# Altium PCB PCB.PcbDoc (part 3 of 3)
Units mm, origin at the board's own origin, x right, y up, seen from the top; angles counter-clockwise.
Board outline 140.5 x 50 mm, 2 copper layers (Top Layer, Bottom Layer), stack 1.69 mm thick; 217 components, 154 nets, 1179 pads, 592 vias.
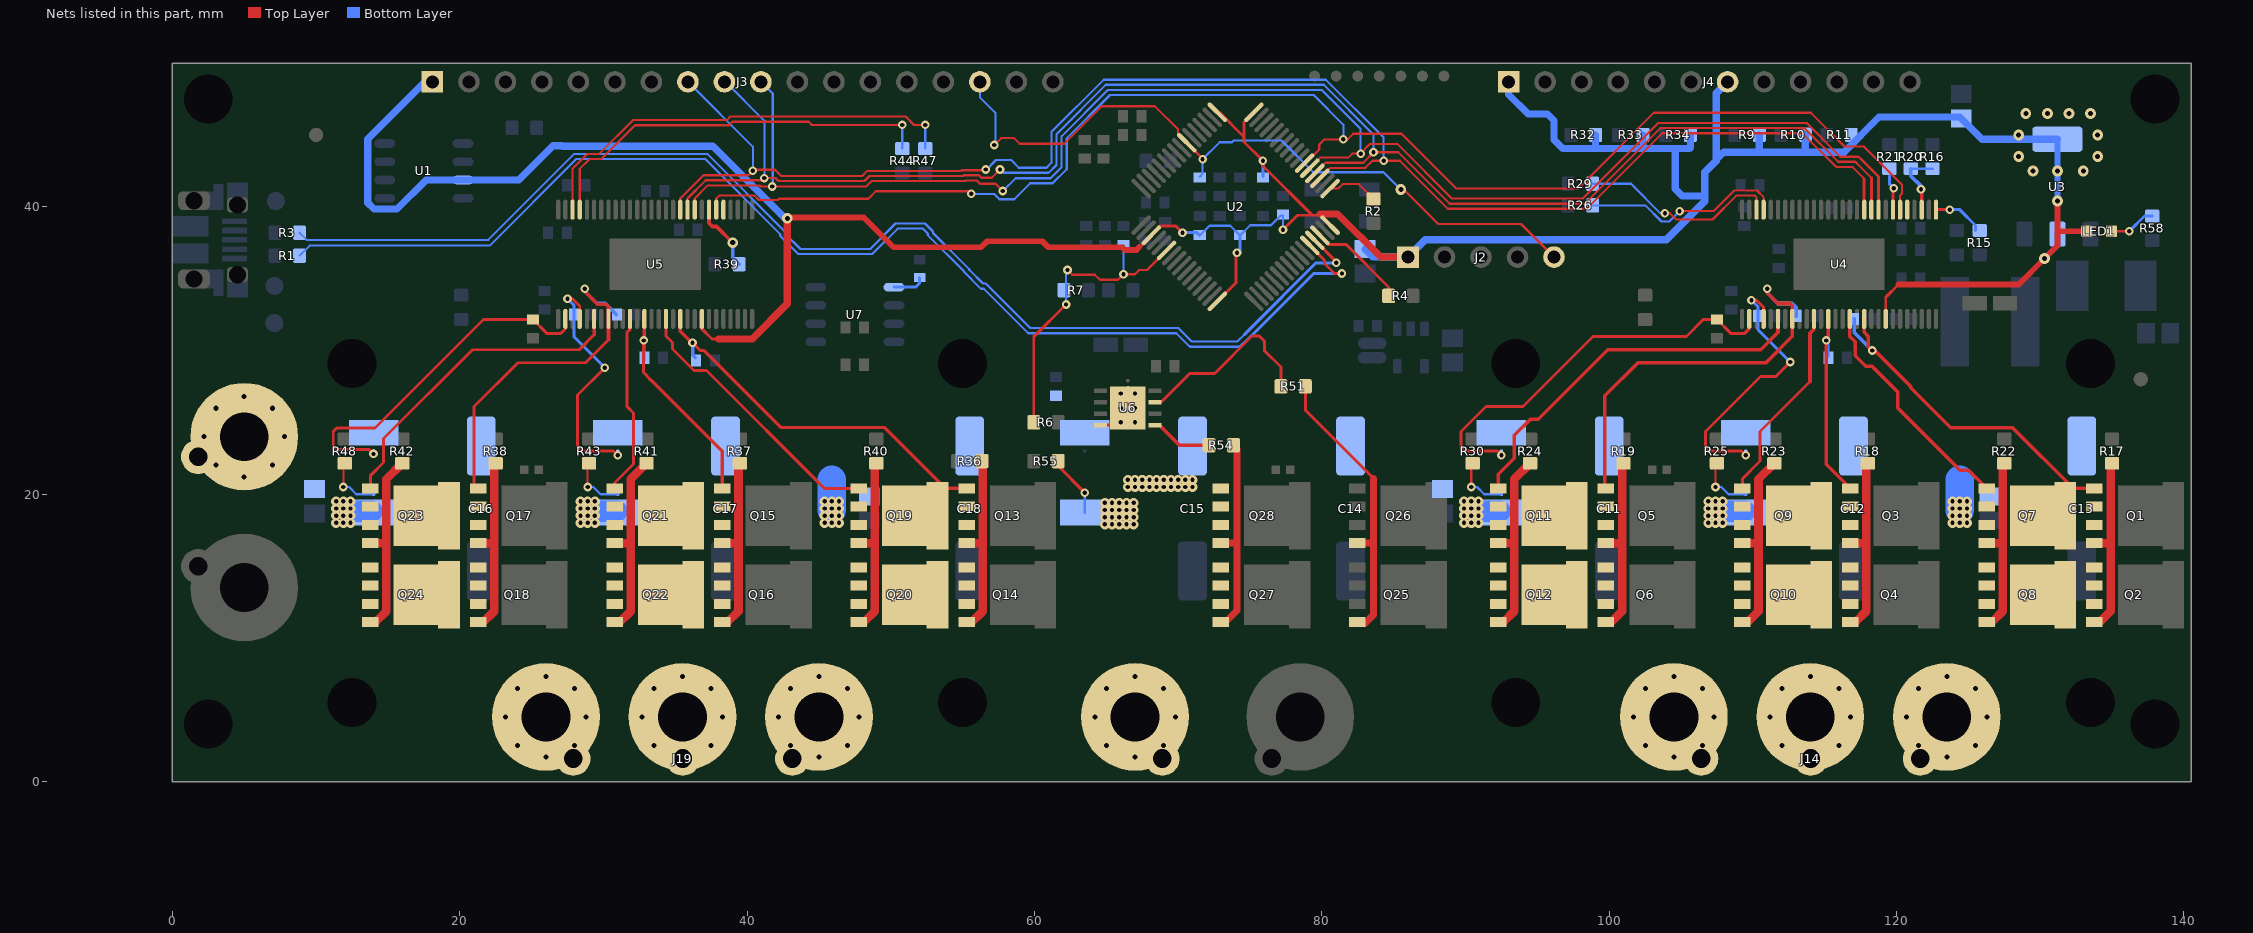
[diagram p3: the nets of this part, all layers, seen from the top]

## Via types
v1: diameter 0.6, hole 0.3, Top Layer to Bottom Layer, tented both sides, 192 vias
v2: diameter 0.7, hole 0.3, Top Layer to Bottom Layer, 154 vias
v3: diameter 0.8, hole 0.3, Top Layer to Bottom Layer, 119 vias
v4: diameter 0.7, hole 0.35, Top Layer to Bottom Layer, 80 vias
v5: diameter 0.75, hole 0.35, Top Layer to Bottom Layer, tented both sides, 37 vias
v6: diameter 0.7, hole 0.3, Top Layer to Bottom Layer, tented both sides, 9 vias
v7: diameter 0.7, hole 0.35, Top Layer to Bottom Layer, tented both sides, 1 vias

## Nets (pads, with @x,y where several pads share a name; then routed paths per layer and width w, separated by ;. In a path a pad name is that pad's centre, name@x,y a point inside that pad or via, vN(x,y) a via of type N, cw(c..) or ccw(c..) an arc to the next point about the centre after c; other vN are vias at no path point) (continued)
NetJ22_1: J22.1 J23.1 R55.2 R56.1 | length 4.5
  Top Layer w0.203: R55.2@61.65,22.3 61.65,21.95 v1(63.5,20.1) ; v2(64.9,19.4) v2@65,19.5
  Bottom Layer w0.203: R56.1@63.5,18.725 v1(63.5,20.1)
  other v2: 64.9,17.9 65.4,17.9 65.9,17.9 66.4,17.9 66.9,17.9 64.9,18.4 65.4,18.4 65.9,18.4 66.4,18.4 66.9,18.4 64.9,18.9 65.4,18.9 65.9,18.9 66.4,18.9 66.9,18.9 65.4,19.4 65.9,19.4 66.4,19.4 66.9,19.4
  other v4: 67,1.7 65.02,2.52 68.98,2.52 64.2,4.5 69.8,4.5 65.02,6.48 68.98,6.48 67,7.3
NetLED1_K: LED1.K R58.1 | length 3.3
  Top Layer w0.203: LED1.K@134.95,38.3 v1(136.2,38.3)
  Bottom Layer w0.203: v1(136.2,38.3) 137.25,39.35 R58.1@137.8,39.35
NetQ1_G: Q1.G Q2.G R17.1 | length 29.6
  Top Layer w0.6: Q2.G@133.775,11.095 134.141,11.095 134.897,11.851 134.897,16.595 ; Q1.G@133.775,16.595 134.897,16.595 ; R17.1@135,22.15 R17.1@134.897,22.15 ; 134.897,16.595 R17.1@134.897,22.15 ; 134.897,16.595 R17.1@134.897,22.15 ; 134.897,16.595 R17.1@134.897,22.15 ; 134.897,16.595 R17.1@134.897,22.15
NetQ3_G: Q3.G Q4.G R18.1 | length 29.6
  Top Layer w0.6: Q4.G@116.775,11.095 117.141,11.095 117.897,11.851 117.897,16.595 ; Q3.G@116.775,16.595 117.897,16.595 ; R18.1@118,22.15 R18.1@117.897,22.15 ; 117.897,16.595 R18.1@117.897,22.15 ; 117.897,16.595 R18.1@117.897,22.15 ; 117.897,16.595 R18.1@117.897,22.15 ; 117.897,16.595 R18.1@117.897,22.15
NetQ5_G: Q5.G Q6.G R19.1 | length 29.6
  Top Layer w0.6: Q6.G@99.775,11.095 100.141,11.095 100.897,11.851 100.897,16.595 ; Q5.G@99.775,16.595 100.897,16.595 ; R19.1@101,22.15 R19.1@100.897,22.15 ; 100.897,16.595 R19.1@100.897,22.15 ; 100.897,16.595 R19.1@100.897,22.15 ; 100.897,16.595 R19.1@100.897,22.15 ; 100.897,16.595 R19.1@100.897,22.15
NetQ7_G: Q7.G Q8.G R22.1 | length 29.6
  Top Layer w0.6: Q8.G@126.275,11.095 126.641,11.095 127.397,11.851 127.397,16.595 ; Q7.G@126.275,16.595 127.397,16.595 ; R22.1@127.5,22.15 R22.1@127.397,22.15 ; 127.397,16.595 R22.1@127.397,22.15 ; 127.397,16.595 R22.1@127.397,22.15 ; 127.397,16.595 R22.1@127.397,22.15 ; 127.397,16.595 R22.1@127.397,22.15
NetQ9_G: Q9.G Q10.G R23.1 | length 13.3
  Top Layer w0.6: Q10.G@109.275,11.095 109.641,11.095 110.397,11.851 110.397,16.595 ; Q9.G@109.275,16.595 110.397,16.595 ; R23.1@111.5,22.15 110.397,21.047 110.397,16.595
NetQ11_G: Q11.G Q12.G R24.1 | length 13.3
  Top Layer w0.6: Q12.G@92.275,11.095 92.641,11.095 93.397,11.851 93.397,16.595 ; Q11.G@92.275,16.595 93.397,16.595 ; R24.1@94.5,22.15 93.397,21.047 93.397,16.595
NetQ13_G: Q13.G Q14.G R36.2 | length 29.6
  Top Layer w0.6: Q14.G@55.275,11.095 55.641,11.095 56.397,11.851 56.397,16.595 ; Q13.G@55.275,16.595 56.397,16.595 ; R36.2@56.5,22.15 R36.2@56.397,22.15 ; 56.397,16.595 R36.2@56.397,22.15 ; 56.397,16.595 R36.2@56.397,22.15 ; 56.397,16.595 R36.2@56.397,22.15 ; 56.397,16.595 R36.2@56.397,22.15
NetQ15_G: Q15.G Q16.G R37.2 | length 29.6
  Top Layer w0.6: Q16.G@38.275,11.095 38.641,11.095 39.397,11.851 39.397,16.595 ; Q15.G@38.275,16.595 39.397,16.595 ; R37.2@39.5,22.15 R37.2@39.397,22.15 ; 39.397,16.595 R37.2@39.397,22.15 ; 39.397,16.595 R37.2@39.397,22.15 ; 39.397,16.595 R37.2@39.397,22.15 ; 39.397,16.595 R37.2@39.397,22.15
NetQ17_G: Q17.G Q18.G R38.2 | length 29.6
  Top Layer w0.6: Q18.G@21.275,11.095 21.641,11.095 22.397,11.851 22.397,16.595 ; Q17.G@21.275,16.595 22.397,16.595 ; R38.2@22.5,22.15 R38.2@22.397,22.15 ; 22.397,16.595 R38.2@22.397,22.15 ; 22.397,16.595 R38.2@22.397,22.15 ; 22.397,16.595 R38.2@22.397,22.15 ; 22.397,16.595 R38.2@22.397,22.15
NetQ19_G: Q19.G Q20.G R40.2 | length 29.6
  Top Layer w0.6: Q20.G@47.775,11.095 48.141,11.095 48.897,11.851 48.897,16.595 ; Q19.G@47.775,16.595 48.897,16.595 ; R40.2@49,22.15 R40.2@48.897,22.15 ; 48.897,16.595 R40.2@48.897,22.15 ; 48.897,16.595 R40.2@48.897,22.15 ; 48.897,16.595 R40.2@48.897,22.15 ; 48.897,16.595 R40.2@48.897,22.15
NetQ21_G: Q21.G Q22.G R41.2 | length 13.3
  Top Layer w0.6: Q22.G@30.775,11.095 31.141,11.095 31.897,11.851 31.897,16.595 ; Q21.G@30.775,16.595 31.897,16.595 ; R41.2@33,22.15 31.897,21.047 31.897,16.595
NetQ23_G: Q23.G Q24.G R42.2 | length 13.3
  Top Layer w0.6: Q24.G@13.775,11.095 14.141,11.095 14.897,11.851 14.897,16.595 ; Q23.G@13.775,16.595 14.897,16.595 ; R42.2@16,22.15 14.897,21.047 14.897,16.595
NetQ25_G: Q25.G Q26.G R51.2 | length 19.7
  Top Layer w0.203: R51.2@78.85,27.4 78.85,25.85 83.6,21.1
  Top Layer w0.5: Q26.G@82.475,16.595 82.48,16.6 83.6,16.6 ; Q25.G@83,11 83.6,11.6 83.6,16.6 ; 83.6,21.1 83.6,16.6
NetQ27_G: Q27.G Q28.G R54.2 | length 14
  Top Layer w0.5: Q28.G@72.975,16.595 72.98,16.6 74.1,16.6 ; Q27.G@73.2,11 74.1,11.9 74.1,15.6 ; R54.2@73.85,23.4 74.095,23.155 74.095,21.095 74.1,21.1 74.1,16.6 ; 74.095,15.595 74.1,15.6 ; 74.1,15.6 74.1,16.6
NetR15_1: R15.1 U4.1 | length 3.6
  Top Layer w0.203: U4.1@122.75,39.8 v1(123.7,39.8)
  Bottom Layer w0.203: v1(123.7,39.8) 124.4,39.8 125.5,38.7 R15.1@125.5,38.35
NetR16_2: R16.2 R20.1 U4.3 | length 4.7
  Top Layer w0.25: v1(121.7,41.225) 121.75,41.175 U4.3@121.75,39.8
  Bottom Layer w0.203: R20.1@121,42.65 R16.2@122.5,42.65
  Bottom Layer w0.25: R20.1@121,42.65 121,42.15 121.7,41.45 v1(121.7,41.225)
NetR21_1: R21.1 U4.7 | length 2.5
  Top Layer w0.203: U4.7@119.75,39.8 119.75,41.25 v1(119.8,41.3)
  Bottom Layer w0.203: 119.5,42.15 119.5,41.6 v1(119.8,41.3)
NetR26_1: R26.1 U4.25 | length 14.3
  Top Layer w0.152: v1(104.9,39.7) 107.266,39.7 108.701,41.135 110.288,41.135 110.75,40.672 U4.25@110.75,39.8
  Bottom Layer w0.152: R26.1@98.85,40.1 102.519,40.1 103.64,38.979 104.179,38.979 v1(104.9,39.7)
NetR29_1: R29.1 U4.26 | length 14
  Top Layer w0.152: v1(103.88,39.558) 104.223,39.558 104.66,39.121 107.189,39.121 108.848,40.779 110.141,40.779 110.25,40.67 U4.26@110.25,39.8
  Bottom Layer w0.152: R29.1@98.85,41.6 101.522,41.6 103.564,39.558 v1(103.88,39.558)
NetR39_1: R39.1 U5.7 | length 4.8
  Top Layer w0.25: U5.7@37.35,39.8 37.35,38.861 37.583,38.628 37.872,38.628 v5(39,37.5)
  Bottom Layer w0.25: v5(39,37.5) 39,36.45 R39.1@39.45,36
NetR44_1: R44.1 U5.25 | length 28.4
  Top Layer w0.152: U5.25@28.35,39.8 28.35,42.64 29.039,43.329 29.854,43.329 32.204,45.679 38.739,45.679 38.982,45.922 44.297,45.922 44.519,45.7 v1(50.8,45.7)
  Bottom Layer w0.152: R44.1@50.8,44.05 v1(50.8,45.7)
NetR47_1: R47.1 U5.26 | length 30.8
  Top Layer w0.152: U5.26@27.85,39.8 27.85,42.642 28.892,43.685 29.706,43.685 32.056,46.035 38.592,46.035 38.837,46.279 51.04,46.279 51.619,45.7 v1(52.4,45.7)
  Bottom Layer w0.152: R47.1@52.4,44.05 v1(52.4,45.7)
NetR51_1: R51.1 U6.7 | length 13.4
  Top Layer w0.203: U6.7@68.395,26.4 68.804,26.4 70.804,28.4 72.545,28.4 75.149,31.005 75.65,31.005 76.008,30.647 76.008,29.982 77.15,28.84 R51.1@77.15,27.4
NetR54_1: R54.1 U6.5 | length 4.3
  Top Layer w0.25: U6.5@68.395,24.8 68.7,24.8 70.1,23.4 R54.1@72.15,23.4
NetR57_1: R57.1 U7.5 | length 2.3
  Bottom Layer w0.203: U7.5@50.225,34.405 51.73,34.405 52,34.675 R57.1@52,35.075
NetU4_5: U4.5
NetU5_5: U5.5
NFAULT_1: U2.54 U4.6 U5.6 | length 101.5
  Top Layer w0.152: U5.6@37.85,39.8 37.85,40.576 38.053,40.779 40.528,40.779 40.828,40.479 42.137,40.479 42.219,40.562 48.443,40.562 48.96,41.079 55.421,41.079 v1(55.6,40.9) ; U2.54@78.808,43.041 78.87,43.041 79.821,43.991 79.821,44.34 80.16,44.679 81.479,44.679 v1(81.5,44.7) 81.8,44.7 82.19,45.09 85.54,45.09 89.35,41.28 97.848,41.28 103.113,46.544 114.037,46.544 116.381,44.2 117.719,44.2 120.379,41.54 120.379,40.924 120.25,40.795 U4.6@120.25,39.8
  Bottom Layer w0.152: v1(55.6,40.9) 57.181,40.9 57.56,40.521 58.6,40.521 59.713,41.634 61.259,41.634 62.244,42.619 62.244,44.765 65.258,47.779 79.44,47.779 81.5,45.719 v1(81.5,44.7)
NRST_1: C6.2 J2.5 J3.16 U2.7 | length 52.3
  Top Layer w0.152: v1(57.2,44.3) 57.679,44.779 58.586,44.779 58.977,44.388 62.069,44.388 64.684,47.004 68.376,47.004 70,45.381 70,45.061 U2.7@70.606,44.455 ; v5(85.5,41.2) 85.7,41.2 88.1,38.8 93.86,38.8 J2.5@96.16,36.5
  Top Layer w0.203: U2.7@70.606,44.455 71.7,43.361 v1(71.7,43.3)
  Bottom Layer w0.152: J3.16@56.2,48.7 56.2,47.619 57.279,46.54 57.279,44.379 v1(57.2,44.3) ; C6.2@71.6,42.1 71.5,42.1 71.7,42.3 v1(71.7,43.3) 72.896,44.496 73.75,44.496 73.871,44.616 77.194,44.616 79.4,42.411 84.289,42.411 v5(85.5,41.2)
PGND: C11.2 C12.2 C13.2 C14.2 C15.2 C16.2 C17.2 C18.2 C26.1 C40.1 C44.1 C55.1 C61.1 J8.1 J9.1 NT2.2 NT3.2 NT4.2 NT5.2 NT6.2 NT7.2 Q7.S Q8.S Q19.S Q20.S Q27.S Q28.S R27.1 R28.1 R45.1 R46.1 R56.2 U4.44 U5.44 U6.4 U6.9 | length 42.2
  Top Layer w0.203: U5.44@34.35,32.2 34.35,31.005 34.444,30.911 34.444,30.905 34.45,30.905 34.805,30.55 34.805,30.095 36.3,28.6 37.181,28.6 45.376,20.405 Q19.S@47.775,20.405 ; U6.4@64.605,24.8 65.3,24.8 U6.9@66.5,26
  Top Layer w0.25: U4.44@116.75,32.2 116.75,30.978 117.128,30.6 117.128,29.643 117.868,28.903 118.291,28.903 120.078,27.116 120.078,26 124.4,21.678 125.002,21.678 Q7.S@126.275,20.405
  Bottom Layer w2: v2@45.9,18.9 v2(45.9,19) v2(45.9,19.5) 45.9,21 ; v2@124.4,18.9 v2(124.4,19) v2(124.4,19.5) 124.4,21
  other v2: 45.4,18 45.9,18 46.4,18 123.9,18 124.4,18 124.9,18 45.4,18.5 45.9,18.5 46.4,18.5 123.9,18.5 124.4,18.5 124.9,18.5 45.4,19 46.4,19 123.9,19 124.9,19 45.4,19.5 46.4,19.5 123.9,19.5 124.9,19.5 66.5,20.5 67,20.5 67.5,20.5 68,20.5 68.5,20.5 69,20.5 69.5,20.5 70,20.5 70.5,20.5 71,20.5 66.5,21 67,21 67.5,21 68,21 68.5,21 69,21 69.5,21 70,21 70.5,21 71,21 66,25 67,25 66,26 67,26 66,27 67,27
  other v4: 5,21.2 3.02,22.02 6.98,22.02 2.2,24 7.8,24 3.02,25.98 6.98,25.98 5,26.8
SH_A_2: C30.1 J11.1 J14.3 Q1.S Q2.S Q7.D Q8.D U4.46 | length 24.7
  Top Layer w0.25: U4.46@117.772,32.178 U4.46@117.75,32.2 117.75,31.259 118.034,30.975 118.034,30.266 v1(118.3,30) 118.476,30 120.984,27.491 120.984,27.416 123.772,24.628 128.07,24.628 132.293,20.405 Q1.S@133.775,20.405
  Bottom Layer w0.25: C30.1@117.05,32.2 117.05,31.25 v1(118.3,30)
  other v4: 123.5,1.7 121.52,2.52 125.48,2.52 120.7,4.5 126.3,4.5 121.52,6.48 125.48,6.48 123.5,7.3
SH_A_3: C45.1 J16.1 J19.3 Q13.S Q14.S Q19.D Q20.D U5.46 | length 26.4
  Top Layer w0.203: v1(36.204,30.544) 36.76,29.988 37.012,29.988 42.372,24.628 49.57,24.628
  Top Layer w0.25: U5.46@35.35,32.2 35.35,31.333 v1@36.139,30.544 ; 49.57,24.628 53.793,20.405 Q13.S@55.275,20.405
  Bottom Layer w0.25: v1(36.204,30.544) 36.224,30.524 36.224,29.797 36.204,29.777 36.204,29.696 C45.1@36.4,29.5
  other v4: 45,1.7 43.02,2.52 46.98,2.52 42.2,4.5 47.8,4.5 43.02,6.48 46.98,6.48 45,7.3
SH_B_2: C31.1 J12.1 J14.2 Q3.S Q4.S Q9.D Q10.D U4.41 | length 13.7
  Top Layer w0.25: U4.41@115.25,32.2 115.25,30.85 v1(115.1,30.7) 115.1,22.08 Q3.S@116.775,20.405
  Bottom Layer w0.25: v1(115.1,30.7) 115.2,30.6 C31.1@115.2,29.6
  other v4: 114,1.7 112.02,2.52 115.98,2.52 111.2,4.5 116.8,4.5 112.02,6.48 115.98,6.48 114,7.3
SH_B_3: C46.1 J17.1 J19.2 Q15.S Q16.S Q21.D Q22.D U5.41 | length 15.5
  Top Layer w0.203: v1(32.8,30.7) 32.8,28.464 33.048,28.216 33.048,28.183 33.3,27.931 33.333,27.931 38.275,22.989
  Top Layer w0.25: v1(32.8,30.7) 32.85,30.75 U5.41@32.85,32.2 ; Q15.S@38.275,20.405 38.275,22.989
  Bottom Layer w0.25: C46.1@32.8,29.3 32.85,29.35 32.8,29.4 v1(32.8,30.7)
  other v4: 35.5,1.7 33.52,2.52 37.48,2.52 32.7,4.5 38.3,4.5 33.52,6.48 37.48,6.48 35.5,7.3
SH_C_2: C34.1 J13.1 J14.1 Q5.S Q6.S Q11.D Q12.D U4.36 | length 29.1
  Top Layer w0.25: Q5.S@99.775,20.405 99.7,20.48 99.7,26.841 102.006,29.147 110.917,29.147 112.75,30.98 U4.36@112.75,32.2 112.75,33.139 112.617,33.272 111.74,33.272 111,34.012 v1(111,34.3)
  Bottom Layer w0.25: v1(111,34.3) 111,34.012 111.74,33.272 112.728,33.272 113,33 C34.1@113,32.4
  other v4: 104.5,1.7 102.52,2.52 106.48,2.52 101.7,4.5 107.3,4.5 102.52,6.48 106.48,6.48 104.5,7.3
SH_C_3: C49.1 J18.1 J19.1 Q17.S Q18.S Q23.D Q24.D U5.36 | length 24.8
  Top Layer w0.203: Q17.S@21.275,20.405 21,20.68 21,26.1 24.047,29.147 28.747,29.147 30.35,30.75
  Top Layer w0.25: Q17.S@21.2,20.48 Q17.S@21.275,20.405 ; v1(28.7,34.3) 28.7,34.112 29.584,33.228 30.172,33.228 30.35,33.05 30.35,30.75
  Bottom Layer w0.25: v1(28.7,34.3) 28.7,34.112 29.534,33.278 30.122,33.278 C49.1@30.9,32.5
  other v4: 26,1.7 24.02,2.52 27.98,2.52 23.2,4.5 28.8,4.5 24.02,6.48 27.98,6.48 26,7.3
SL_B_2: NT8.2 Q9.S Q10.S R27.2 U4.39 | length 15.7
  Top Layer w0.203: v2(107.4,19.5) v2@107.5,19.6 ; Q9.S@109.275,20.405 109.275,21.075 110.5,22.3 110.5,24.359 113.978,27.837
  Top Layer w0.25: 113.978,27.837 113.978,31.202 114.25,31.474 U4.39@114.25,32.2
  Bottom Layer w1.5: v2@107.7,18.8 R27.2@109.425,18.8
  other v2: 106.9,18 107.4,18 107.9,18 106.9,18.5 107.4,18.5 107.9,18.5 106.9,19 107.4,19 107.9,19 106.9,19.5 107.9,19.5
SL_B_3: NT10.2 Q21.S Q22.S R45.2 U5.39 | length 14.5
  Top Layer w0.203: v2(28.9,19.5) v2@29,19.6 ; Q21.S@30.775,20.405 30.775,20.78 32.086,22.091 32.086,25.65 31.655,26.081 31.655,31.279 31.828,31.452
  Top Layer w0.25: 31.828,31.452 31.828,32.178 U5.39@31.85,32.2
  Bottom Layer w1.5: v2@29.2,18.8 R45.2@30.925,18.8
  other v2: 28.4,18 28.9,18 29.4,18 28.4,18.5 28.9,18.5 29.4,18.5 28.4,19 28.9,19 29.4,19 28.4,19.5 29.4,19.5
SL_C_2: NT9.2 Q11.S Q12.S R28.2 U4.34 | length 28.4
  Top Layer w0.203: v2(90.4,19.5) v2@90.5,19.6
  Top Layer w0.25: Q11.S@92.275,20.405 92.275,21.375 93.4,22.5 93.4,24.098 94.521,25.219 95.058,25.219 99.892,30.053 110.542,30.053 111.75,31.261 U4.34@111.75,32.2
  Bottom Layer w0.152: R28.2@92.425,18.8 R28.2@92.5,18.725
  Bottom Layer w1.5: v2@90.7,18.8 R28.2@92.425,18.8
  other v2: 89.9,18 90.4,18 90.9,18 89.9,18.5 90.4,18.5 90.9,18.5 89.9,19 90.4,19 90.9,19 89.9,19.5 90.9,19.5
SL_C_3: NT11.2 Q23.S Q24.S R46.2 U5.34 | length 24.2
  Top Layer w0.203: Q23.S@13.775,20.405 13.775,21.275 14.7,22.2 14.7,23.865 20.888,30.053 28.312,30.053 29.35,31.091
  Top Layer w0.25: 29.35,31.091 U5.34@29.35,32.2
  Bottom Layer w0.152: R46.2@13.925,18.8 R46.2@14,18.725
  Bottom Layer w1.5: R46.2@12.4,18.8 R46.2@13.925,18.8
  other v2: 11.4,18 11.9,18 12.4,18 11.4,18.5 11.9,18.5 12.4,18.5 11.4,19 11.9,19 12.4,19 11.4,19.5 11.9,19.5 12.4,19.5
SN1_2: NT8.1 R25.1 | length 4
  Top Layer w0.152: v1(107.4,20.5) 107.4,22.05 R25.1@107.5,22.15
  Bottom Layer w0.152: v1(107.4,20.5) 107.8,20.5 108.3,20 NT8.1@109.5,20
SN1_3: NT10.1 R43.1 | length 4
  Top Layer w0.152: v1(28.9,20.5) 28.9,22.05 R43.1@29,22.15
  Bottom Layer w0.152: v1(28.9,20.5) 29.3,20.5 29.8,20 NT10.1@31,20
SN2_2: NT9.1 R30.1 | length 4
  Top Layer w0.152: v1(90.4,20.5) 90.4,22.05 R30.1@90.5,22.15
  Bottom Layer w0.152: v1(90.4,20.5) 90.8,20.5 91.3,20 NT9.1@92.5,20
SN2_3: NT11.1 R48.1 | length 4
  Top Layer w0.152: v1(11.9,20.5) 11.9,22.05 R48.1@12,22.15
  Bottom Layer w0.152: v1(11.9,20.5) 12.3,20.5 12.8,20 NT11.1@14,20
SP1_2: C36.2 NT2.1 U4.32 | length 19.5
  Top Layer w0.203: v1(109.5,22.7) 109.205,22.995 106.94,22.995 106.695,23.24 106.695,24.36 110.532,28.197 111.597,28.197 v1(112.6,29.2) ; v1(109.9,33.5) 110.264,33.5 110.75,33.014 U4.32@110.75,32.2
  Bottom Layer w0.152: v1(109.5,22.7) NT2.1@109.5,22.9
  Bottom Layer w0.203: v1(109.9,33.5) 110.35,33.05 C36.2@110.35,32.4 110.35,31.45 v1(112.6,29.2)
SP1_3: C51.2 NT4.1 U5.32 | length 17.4
  Top Layer w0.203: v1(27.5,33.6) 27.856,33.6 28.35,33.106 U5.32@28.35,32.2 ; v1(30.1,28.8) 28.195,26.895 28.195,23.34 28.54,22.995 30.705,22.995 v1(31,22.7)
  Bottom Layer w0.152: v1(31,22.7) NT4.1@31,22.9
  Bottom Layer w0.203: v1(27.5,33.6) 27.95,33.15 C51.2@27.95,32.5 27.95,30.95 v1(30.1,28.8)
SP2_2: C42.2 NT3.1 U4.30 | length 28.8
  Top Layer w0.203: v1(92.5,22.7) 92.205,22.995 89.94,22.995 89.695,23.24 89.695,24.36 91.435,26.1 93.992,26.1 98.869,30.977 105.377,30.977 106.55,32.15 C42.2@107.5,32.15 108.455,31.195 109.438,31.195 109.75,31.507 U4.30@109.75,32.2
  Bottom Layer w0.152: v1(92.5,22.7) NT3.1@92.5,22.9
SP2_3: C57.2 NT5.1 U5.30 | length 25.1
  Top Layer w0.203: v1(14,22.8) 13.705,23.095 11.44,23.095 11.195,23.34 11.195,24.36 11.44,24.605 14.105,24.605 21.65,32.15 C57.2@25.1,32.15 26.055,31.195 27.038,31.195 27.395,31.552 U5.30@27.395,32 ; U5.30@27.395,32 27.35,32.045 U5.30@27.35,32.2 27.395,32.155 U5.30@27.395,32
  Bottom Layer w0.152: v1(14,22.8) NT5.1@14,23
SPI_MISO_1: J3.9 U2.52 U4.10 U5.10 | length 110.8
  Top Layer w0.152: U5.10@35.85,39.8 35.85,40.581 37.114,41.845 41.045,41.845 v1(41.2,42) 41.983,42 42.183,41.799 48.172,41.799 48.518,42.145 55.021,42.145 55.066,42.19 56.134,42.19 56.304,42.021 57.021,42.021 v1(57.6,42.6) ; U2.52@79.515,42.333 80.247,43.065 82.885,43.065 83.6,43.781 v1(83.6,43.8) 85.322,43.8 88.908,40.213 98.29,40.213 103.554,45.478 113.595,45.478 115.939,43.134 117.141,43.134 117.237,43.037 118.25,42.025
  Top Layer w0.203: U4.10@118.25,39.8 118.25,42.025
  Bottom Layer w0.152: J3.9@38.42,48.7 38.5,48.7 41.2,46 v1(41.2,42) ; v1(57.6,42.6) 57.834,42.366 60.987,42.366 61.534,42.913 61.534,45.059 64.964,48.489 79.538,48.489 80.132,48.489 83.6,45.021 v1(83.6,43.8)
SPI_MOSI_1: J3.10 U2.53 U4.9 U5.9 | length 110.6
  Top Layer w0.152: U5.9@36.35,39.8 36.35,40.579 37.261,41.49 40.865,41.49 40.941,41.414 v1(41.75,41.414) 48.29,41.414 48.666,41.79 55.168,41.79 55.213,41.835 55.987,41.835 56.211,41.611 57.289,41.611 v1(57.8,41.1) ; U2.53@79.162,42.687 79.896,43.421 81.843,43.421 82.122,43.7 v1(82.7,43.7) 82.7,43.719 83.36,44.379 85.245,44.379 89.056,40.569 98.143,40.569 103.407,45.833 113.743,45.833 116.086,43.489 117.36,43.489 117.525,43.325 118.739,42.11
  Top Layer w0.203: 118.739,42.11 118.739,40.661 118.75,40.65 U4.9@118.75,39.8
  Bottom Layer w0.152: J3.10@40.96,48.7 41.779,47.881 41.779,41.444 v1(41.75,41.414) ; v1(57.8,41.1) 58.689,41.989 61.112,41.989 61.889,42.766 61.889,44.912 65.111,48.134 79.685,48.134 79.985,48.134 82.7,45.419 v1(82.7,43.7)
SPI_SCK_1: J3.8 U2.51 U4.11 U5.11 | length 112
  Top Layer w0.152: U5.11@35.35,39.8 35.35,40.584 36.967,42.201 40.101,42.201 v1(40.4,42.5) 40.479,42.579 41.94,42.579 42.365,42.155 48.025,42.155 48.371,42.501 54.874,42.501 54.918,42.545 56.545,42.545 v1(56.6,42.6) ; U2.51@79.869,41.98 80.599,42.71 83.032,42.71 83.522,43.2 v1(84.3,43.2) 85.419,43.2 88.761,39.858 98.437,39.858 103.701,45.122 113.448,45.122 115.792,42.778 116.922,42.778 116.95,42.75 117.75,41.95
  Top Layer w0.203: U4.11@117.75,39.8 117.75,41.95
  Bottom Layer w0.152: J3.8@35.88,48.7 40.4,44.18 v1(40.4,42.5) ; v1(56.6,42.6) 56.675,42.6 57.329,43.254 58.374,43.254 58.907,42.721 60.84,42.721 61.179,43.06 61.179,45.206 64.817,48.844 79.391,48.844 ; 79.391,48.844 80.279,48.844 84.3,44.823 v1(84.3,43.2)
SWCLK_1: R2.2 U2.49 | length 3.6
  Top Layer w0.152: U2.49@80.576,41.273 81.154,41.273 81.46,41.579 82.571,41.579 R2.2@83.6,40.55
SWDIO_1: R4.2 U2.46 | length 7
  Top Layer w0.203: U2.46@79.869,38.02 79.933,38.02 79.933,37.892 80.436,37.389 81.689,37.389 84.65,34.427 R4.2@84.65,33.8
USB_DM_1: R1.1 U2.44 | length 87.7
  Top Layer w0.203: U2.44@79.162,37.313 80.195,36.279 80.195,36.049 80.886,35.358 v1(81.4,35.358)
  Bottom Layer w0.152: R1.1@8.85,36.6 9.55,37.3 22.08,37.3 28.109,43.329 37.078,43.329 42.311,38.097 42.311,37.966 43.566,36.711 48.711,36.711 50.479,38.479 52.24,38.479 52.579,38.14 52.579,38.028 55.101,35.506 55.101,35.472 56.272,34.301 56.472,34.301 59.572,31.201 60.472,31.201 69.872,31.201 70.783,30.29 70.808,30.29 70.834,30.264 74.269,30.264 74.504,30.5 74.577,30.5
  Bottom Layer w0.203: 74.577,30.5 75.081,31.005 79.435,35.358 v1(81.4,35.358)
USB_DP_1: R3.1 U2.45 | length 86.3
  Top Layer w0.203: U2.45@79.515,37.667 81,36.182 v1(81,36.1)
  Bottom Layer w0.152: R3.1@8.85,38.2 9.35,37.7 21.978,37.7 27.962,43.684 37.226,43.684 42.666,38.244 42.666,38.113 43.713,37.066 48.563,37.066 50.332,38.834 52.387,38.834 52.934,38.287 52.934,38.175 55.456,35.653 55.456,35.619 56.419,34.656 56.619,34.656 59.719,31.556 60.619,31.556 70.019,31.556 70.93,30.645 70.955,30.645 70.981,30.619 74.122,30.619 74.601,31.099
  Bottom Layer w0.203: 74.601,31.099 74.913,31.411 79.602,36.1 v1(81,36.1)
VBUS_S_1: C1.2 R6.1 R7.2 U2.22 | length 21.6
  Top Layer w0.152: v1(62.3,35.6) 62.624,35.276 64.205,35.276 64.56,34.921 65.821,34.921 v1(66.2,35.3) 67.003,35.3 67.303,35.6 67.832,35.6 U2.22@69.192,36.959
  Top Layer w0.203: R6.1@59.95,25 59.95,30.95 v1(62.2,33.2)
  Bottom Layer w0.152: v1(62.2,33.2) 62.2,35.5 v1(62.3,35.6) ; v1(66.2,35.3) C1.2@66.2,37.35
VCC: C7.1 C8.1 C9.1 C10.1 C19.2 C20.2 J2.1 J3.1 J4.1 J4.7 LED1.A R9.2 R10.2 R11.2 R32.1 R33.1 R34.1 U1.3 U2.1 U2.19 U2.32 U2.48 U2.64 U3.2 U3.4 U4.49 U5.49 | length 239.1
  Top Layer w0.203: U5.49@36.85,32.2 36.805,32.155 36.805,31.552 37.557,30.8 38,30.8 ; 67.375,37.2 68.067,37.892 68.067,38.02 U2.19@68.131,38.02 68.762,38.651 69.849,38.651 v1(70.3,38.2) ; U2.32@72.727,33.424 74.019,34.716 74.019,36.719 v1(74.1,36.8) ; U2.1@72.727,46.576 72.879,46.576 74.589,44.866 74.589,44.714 ; U2.64@75.273,46.576 74.589,45.892 74.589,44.714 ; v1(77.3,38.4) 78.311,39.411 79.334,39.411 ; U2.48@80.576,38.727 79.892,39.411 79.334,39.411 ; U4.49@119.25,32.2 119.25,33.705 120.145,34.6 ; 74.589,44.714 74.589,44.511 v1(75.9,43.2) 75.9,42.845 79.334,39.411
  Top Layer w0.4: v5@42.853,39.253 48.112,39.253 50.182,37.183 56.289,37.183 56.709,37.603 60.545,37.603 60.965,37.183 66.116,37.183 66.303,36.997 67.097,36.997 67.3,37.2 ; 120.145,34.6 128.5,34.6 v5(130.3,36.4) 131.2,37.3 131.2,38.3 ; v5(131.2,40.4) 131.2,38.3 ; LED1.A@133.25,38.3 131.2,38.3
  Top Layer w0.5: 38,30.8 40.353,30.8 42.8,33.247 v5(42.8,39.2) v5@42.853,39.253 ; 79.892,39.507 81.093,39.507 84.1,36.5 J2.1@86,36.5
  Bottom Layer w0.152: C8.1@71.5,38 72.179,38.679 73.621,38.679 74.3,38 75.021,38.721 76.466,38.721 77.145,39.4 77.3,39.4 v1(77.3,38.4)
  Bottom Layer w0.203: v1(70.3,38.2) 71.3,38.2 C8.1@71.5,38 ; v1@74.3,36.8 C9.1@74.3,38 ; C7.1@75.9,42.1 v1(75.9,43.2)
  Bottom Layer w0.4: v5(130.3,36.4) 131.2,37.3 U3.2@131.2,38.1 ; v5(131.2,40.4) U3.4@131.2,44.7
  Bottom Layer w0.5: J3.1@18.1,48.7 17.58,48.7 13.597,44.717 13.597,40.283 14.038,39.842 15.642,39.842 17.665,41.865 U1.3@20.225,41.865 24.1,41.865 26.488,44.253 27.112,44.253 27.152,44.213 37.622,44.213 42.635,39.2 v5(42.8,39.2) ; C20.2@83,37.05 83.55,36.5 J2.1@86,36.5 87.203,37.703 103.968,37.703 106.647,40.382 106.647,40.8 ; J4.1@93,48.7 93,47.825 94.372,46.453 95.712,46.453 96.153,46.012 96.153,44.672 96.778,44.047 99.05,44.047 ; R32.1@99.05,45 99.05,44.047 ; R33.1@102.35,45 102.35,44.097 102.3,44.047 ; R34.1@105.65,45 105.65,44.1 105.597,44.047 104.6,44.047 ; J4.7@108.24,48.7 107.447,47.907 107.447,43.3 ; 110.45,43.853 R9.2@110.45,45 ; 113.65,43.853 R10.2@113.65,45.022 ; U3.4@131.2,44.7 125.95,44.7 C19.2@124.5,46.15 124.397,46.253 118.788,46.253 116.338,43.803 107.95,43.803 107.447,43.3 ; 99.05,44.047 102.3,44.047 ; 102.3,44.047 104.6,44.047 ; 104.6,44.047 104.6,41.235 105.088,40.747 106.594,40.747 106.647,40.8 ; 106.647,40.8 106.647,42.401 107.447,43.201 107.447,43.3
  other v5: 129.5,42.5 131.2,42.5 133,42.5 128.5,43.5 134,43.5 128.5,45 134,45 129,46.5 130.5,46.5 132,46.5 133.5,46.5
pads on no net: C11.0 C12.0 C13.0 C14.0 C15.0 C16.0 C17.0 C18.0 FID1.0 FID2.0 FID3.0 FID4.0 H1.1 H2.1 H3.1 H4.1 H5.1 H6.1 H7.1 H8.1 H9.1 H10.1 H11.1 H12.1 J1.1 J1.4 LED1.0 Q1.7 Q1.9 Q1.10 Q1.11 Q3.7 Q3.9 Q3.10 Q3.11 Q5.7 Q5.9 Q5.10 Q5.11 Q7.7 Q7.9 Q7.10 Q7.11 Q8.7 Q8.9 Q8.10 Q8.11 Q9.7 Q9.9 Q9.10 Q9.11 Q10.7 Q10.9 Q10.10 Q10.11 Q11.7 Q11.9 Q11.10 Q11.11 Q12.7 Q12.9 Q12.10 Q12.11 Q13.7 Q13.9 Q13.10 Q13.11 Q15.7 Q15.9 Q15.10 Q15.11 Q17.7 Q17.9 Q17.10 Q17.11 Q19.7 Q19.9 Q19.10 Q19.11 Q20.7 Q20.9 Q20.10 Q20.11 Q21.7 Q21.9 Q21.10 Q21.11 Q22.7 Q22.9 Q22.10 Q22.11 Q23.7 Q23.9 Q23.10 Q23.11 Q24.7 Q24.9 Q24.10 Q24.11 Q26.7 Q26.9 Q26.10 Q26.11 Q27.7 Q27.9 Q27.10 Q27.11 Q28.7 Q28.9 Q28.10 Q28.11 R1.0 R2.0 R3.0 R4.0 R5.0 R6.0 R7.0 R8.0 R9.0 R10.0 R11.0 R12.0 R13.0 R14.0 R15.0 R16.0 R17.0 R18.0 R19.0 R20.0 R21.0 R22.0 R23.0 R24.0 R25.0 R26.0 R29.0 R30.0 R31.0 R32.0 R33.0 R34.0 R35.0 R36.0 R37.0 R38.0 R39.0 R40.0 R41.0 R42.0 R43.0 R44.0 R47.0 R48.0 R49.0 R50.0 R51.0 R54.0 R55.0 R58.0 U1.5 U1.8 U3.0 U4.4 U4.55 U4.56 U5.1 U5.2 U5.3 U5.4 U5.50 U5.51 U5.52 U5.53 U5.54 U5.56 U7.4 U8.0

## Polygon pours and split planes (outlines as drawn)
GND on Bottom Layer "GND_L02_P139" (solid, pour order 139): 0.5,27.479 140,27.479 140,49.5 0.5,49.5 0.5,27.5
PGND on Bottom Layer "PGND_L02_P137" (solid, pour order 137): 0.5,20 0.5,27.5 140,27.5 140,20
DCBUS on Bottom Layer "DCBUS_L02_P138" (solid, pour order 138): 0.5,17.5 0.5,9 140,9 140,17.5
DCBUS on Bottom Layer "DCBUS_L02_P134" (solid, pour order 134): 84,18 85.5,19.5 88,19.5 89,18.5 89,17.5 84,17.5
VCC on Bottom Layer "VCC_L02_P136" (solid, pour order 136): 125.5,49.5 125.5,47 123.5,45 123.5,41.1 125.5,39.1 132.4,39.1 135.5,36 140,36 140,47 137.5,49.5
DCBUS on Top Layer "DCBUS_L01_P121" (solid, pour order 121): 106,10.5 106,21 101.5,21 101.5,10.5
SH_C_2 on Top Layer "SH_C_2_L01_P131" (solid, pour order 131): 93.5,21 93.5,12 93,11.5 93,8.5 100.5,1 109.5,1 109.5,10 100.5,10 100.5,21
SL_B_2 on Top Layer "SL_B_2_L01_P117" (solid, pour order 117): 106.2,10.5 106.2,19.9 107.7,19.9 108.8,21 109.9,21 109.9,10.5
SL_C_2 on Top Layer "SL_C_2_L01_P115" (solid, pour order 115): 89.2,10.5 89.2,19.9 90.6,19.9 91.7,21 92.9,21 92.9,10.5
NetC59_2 on Top Layer "NETC59_2_L01_P127" (solid, pour order 127): 74.5,5 74.5,20.9 83,20.9 83,11 83,10.5 82.5,10.5 82.5,5 78.5,1
PGND on Top Layer "PGND_L01_P112" (solid, pour order 112): 123.216,10.5 123.216,21 126.916,21 126.916,10.5
SH_B_2 on Top Layer "SH_B_2_L01_P128" (solid, pour order 128): 109.5,21 109.5,10 109.5,1 119,1 119,10 117.5,11.5 117.5,21
SH_A_2 on Top Layer "SH_A_2_L01_P132" (solid, pour order 132): 127.5,21 127.5,11.851 125.5,10.05 119,10.05 119,1 126.5,1 135,9.5 135,21
NetJ22_1 on Top Layer "NETJ22_1_L01_P126" (solid, pour order 126): 63.5,3 62,6 62,19.3 63.5,19.3 64.2,20 68.5,20 70.8,4.5 68.3,0.7
PGND on Top Layer "PGND_L01_P124" (solid, pour order 124): 74,11 70,11 68.5,20 66,20 66,21.5 67,22.5 74,22.5
DCBUS on Top Layer "DCBUS_L01_P123" (solid, pour order 123): 123,10.5 123,21 118.5,21 118.5,10.5
DCBUS on Top Layer "DCBUS_L01_P122" (solid, pour order 122): 140,10.5 140,21 135.5,21 135.5,10.5
DCBUS on Top Layer "DCBUS_L01_P125" (solid, pour order 125): 83.5,9.5 89,9.5 89,21 83.5,21
DCBUS on Top Layer "DCBUS_L01_P118" (solid, pour order 118): 61.5,10.5 61.5,21 57,21 57,10.5
DCBUS on Top Layer "DCBUS_L01_P120" (solid, pour order 120): 44.5,10.5 44.5,21 40,21 40,10.5
SH_A_3 on Top Layer "SH_A_3_L01_P133" (solid, pour order 133): 49,21 49,11.851 47,10.05 40.5,10.05 40.5,1 48,1 56.5,9.5 56.5,21
SH_B_3 on Top Layer "SH_B_3_L01_P129" (solid, pour order 129): 31,21 31,10 31,1 40.5,1 40.5,10 39,11.5 39,21
PGND on Top Layer "PGND_L01_P113" (solid, pour order 113): 44.716,10.5 44.716,21 48.416,21 48.416,10.5
SL_C_3 on Top Layer "SL_C_3_L01_P114" (solid, pour order 114): 10.7,10.5 10.7,19.9 12,19.9 13.1,21 14.4,21 14.4,10.5
SL_B_3 on Top Layer "SL_B_3_L01_P116" (solid, pour order 116): 27.7,10.5 27.7,19.9 29.1,19.9 30.2,21 31.4,21 31.4,10.5
SH_C_3 on Top Layer "SH_C_3_L01_P130" (solid, pour order 130): 15,21 15,12 14.5,11.5 14.5,8.5 22,1 31,1 31,10 21.9,10 21.9,21
DCBUS on Top Layer "DCBUS_L01_P119" (solid, pour order 119): 27.5,10.5 27.5,21 23,21 23,10.5
VCC on Top Layer "VCC_L01_P140" (solid, pour order 140): 125.5,49.5 125.5,47 125.5,40.8 130.3,36 135.5,36 140,36 140,47 137.5,49.5

## Silkscreen, mask and mechanical layers (free items; w line width, h text height)
Top Overlay:
  lines w0.152: 85,46.2 85.5,47
  lines w0.203: 55.4,43.7 55.4,46.9
  lines w0.254: 95.4,38.2 95.4,41 ; 116.3,43.9 116.956,45.025
  lines w0.5: 117.2,26.2 119.1,29.5
  text "B" at 80,47.6 h1.02 r90
  text "C" at 81.5,47.6 h1.02 r90
  text "B" at 84.5,47.6 h1.02 r90
  text "C" at 86,47.6 h1.02 r90
  text "A" at 98.5,46.2 h1.02 r90
  text "B" at 101.1,46.2 h1.02 r90
  text "Z" at 103.7,46.2 h1.02 r90
  text "A" at 113.7,46.2 h1.02 r90
  text "B" at 116.3,46.2 h1.02 r90
  text "Z" at 118.9,46.2 h1.02 r90
  text "M1" at 79.6,46.1 h1.02
  text "M0" at 83.9,46.1 h1.02
  text "H" at 22.8,45.7 h1.2
  text "L" at 25.3,45.7 h1.2
  text "1" at 43.3,45.4 h1.52
  text "2" at 45.5,45.4 h1.52
  text "3" at 48.1,45.4 h1.52
  text "4" at 50.6,45.4 h1.52
  text "5" at 53.1,45.4 h1.52
  text "5V" at 96.1,45.2 h1.02 r90
  text "5V" at 111.3,45.2 h1.02 r90
  text "AUXI" at 83,44.9 h1.02 r90
  text "AGND" at 87.5,44.6 h1.02 r90
  text "AVCC" at 89.1,44.6 h1.02 r90
  text "GND" at 106.2,44.2 h1.02 r90
  text "GND" at 121.4,44.2 h1.02 r90
  text "CAN" at 22.8,43.8 h1.2
  text "GND" at 21.2,43.7 h1.2 r90
  text "GND" at 28.892,43.685 h1.2 r90
  text "SCK" at 36.5,43.7 h1.2 r90
  text "RST" at 57,43.7 h1.2 r90
  text "M1" at 99.6,43.7 h1.52
  text "M0" at 114.6,43.7 h1.52
  text "3.3V" at 93.5,43.3 h1.02 r90
  text "3.3V" at 108.7,43.3 h1.02 r90
  text "MOSI" at 41.7,42.9 h1.2 r90
  text "GPIO" at 46,42.9 h1.52
  text "3.3V" at 18.7,42.7 h1.2 r90
  text "MISO" at 39.1,42.7 h1.2 r90
  text "M1_Z" at 61.9,42.7 h1.2 r90
  text "AVCC" at 31.4,42.5 h1.2 r90
  text "AGND" at 34,42.5 h1.2 r90
  text "M0_Z" at 59.3,42.5 h1.2 r90
  text "PWR" at 132.1,39.5 h1.52
  text "GND" at 91.6,38.4 h1.02 r90
  text "3.3V" at 86.5,38.3 h1.02 r90
  text "SWC" at 89,38.3 h1.02 r90
  text "SWD" at 94.1,38.3 h1.02 r90
  text "RST" at 96.8,38.3 h1.02 r90
  text "ODRIVE" at 5,36 h5.5
  text "48V" at 47.5,36 h5.5
  text "v3.4" at 20.2,33.9 h2.4
  text "DC" at 1.5,29.6 h3
  text "-" at 11.9,26.4 h5 r90
  text "M0" at 112.8,25.9 h4
  text "M1" at 31.1,25.8 h4
  text "AUX" at 62.9,9.3 h3
  text "+" at 12.1,7.6 h5 r90
  text "-" at 62.1,7 h5 r180
  text "C" at 19,3.2 h3
  text "A" at 50.2,3.2 h3
  text "C" at 97.4,3.2 h3
  text "A" at 128.5,3.2 h3
  text "+" at 87.5,2.8 h5 r90
Top Paste:
  rectangle: 64.6,17.6 67.2,19.7
  rectangle: 66.2,20.2 71.3,21.3
  rectangle: 11.1,17.7 12.7,19.8
  rectangle: 28.1,17.7 29.7,19.8
  rectangle: 45.1,17.7 46.7,19.8
  rectangle: 89.6,17.7 91.2,19.8
  rectangle: 106.6,17.7 108.2,19.8
  rectangle: 123.6,17.7 125.2,19.8
Bottom Paste:
  rectangle: 64.6,17.6 67.2,19.7
  rectangle: 66.2,20.2 71.3,21.3
  rectangle: 11.1,17.7 12.7,19.8
  rectangle: 28.1,17.7 29.7,19.8
  rectangle: 45.1,17.7 46.7,19.8
  rectangle: 89.6,17.7 91.2,19.8
  rectangle: 106.6,17.7 108.2,19.8
  rectangle: 123.6,17.7 125.2,19.8
Bottom Solder:
  rectangle: 138.4,20 140,24.5
  rectangle: 138.4,13 140,17.5
Outline:
  the board outline again, w0.2

## Dimensions
2.5,47.5 to 138,47.5 on Mechanical 3
2.5,47.5 to 0,50 on Mechanical 3
133.5,5.5 to 140.5,0 on Mechanical 3
12.5,5.5 to 0,0 on Mechanical 3
55,5.5 to 12.5,5.5 on Mechanical 3
93.5,5.5 to 55,5.5 on Mechanical 3
133.5,5.5 to 93.5,5.5 on Mechanical 3
133.5,5.5 to 133.5,29.1 on Mechanical 3
2.5,4 to 2.5,47.5 on Mechanical 3
2.5,4 to 0,0 on Mechanical 3
0,0 to 0,50 on Mechanical 3
0,0 to 140.5,0 on Mechanical 3